# Altium PCB Ejercicio2.PcbDoc
Units mm, origin at the board's own origin, x right, y up, seen from the top; angles counter-clockwise.
Board outline 77.6 x 53.4 mm, 4 copper layers (Component Side, Ground Plane, Power Plane, Solder Side), stack 0.844 mm thick; 52 components, 26 nets, 282 pads, 96 vias.
Unrouted connection lines stored in the file: 7.
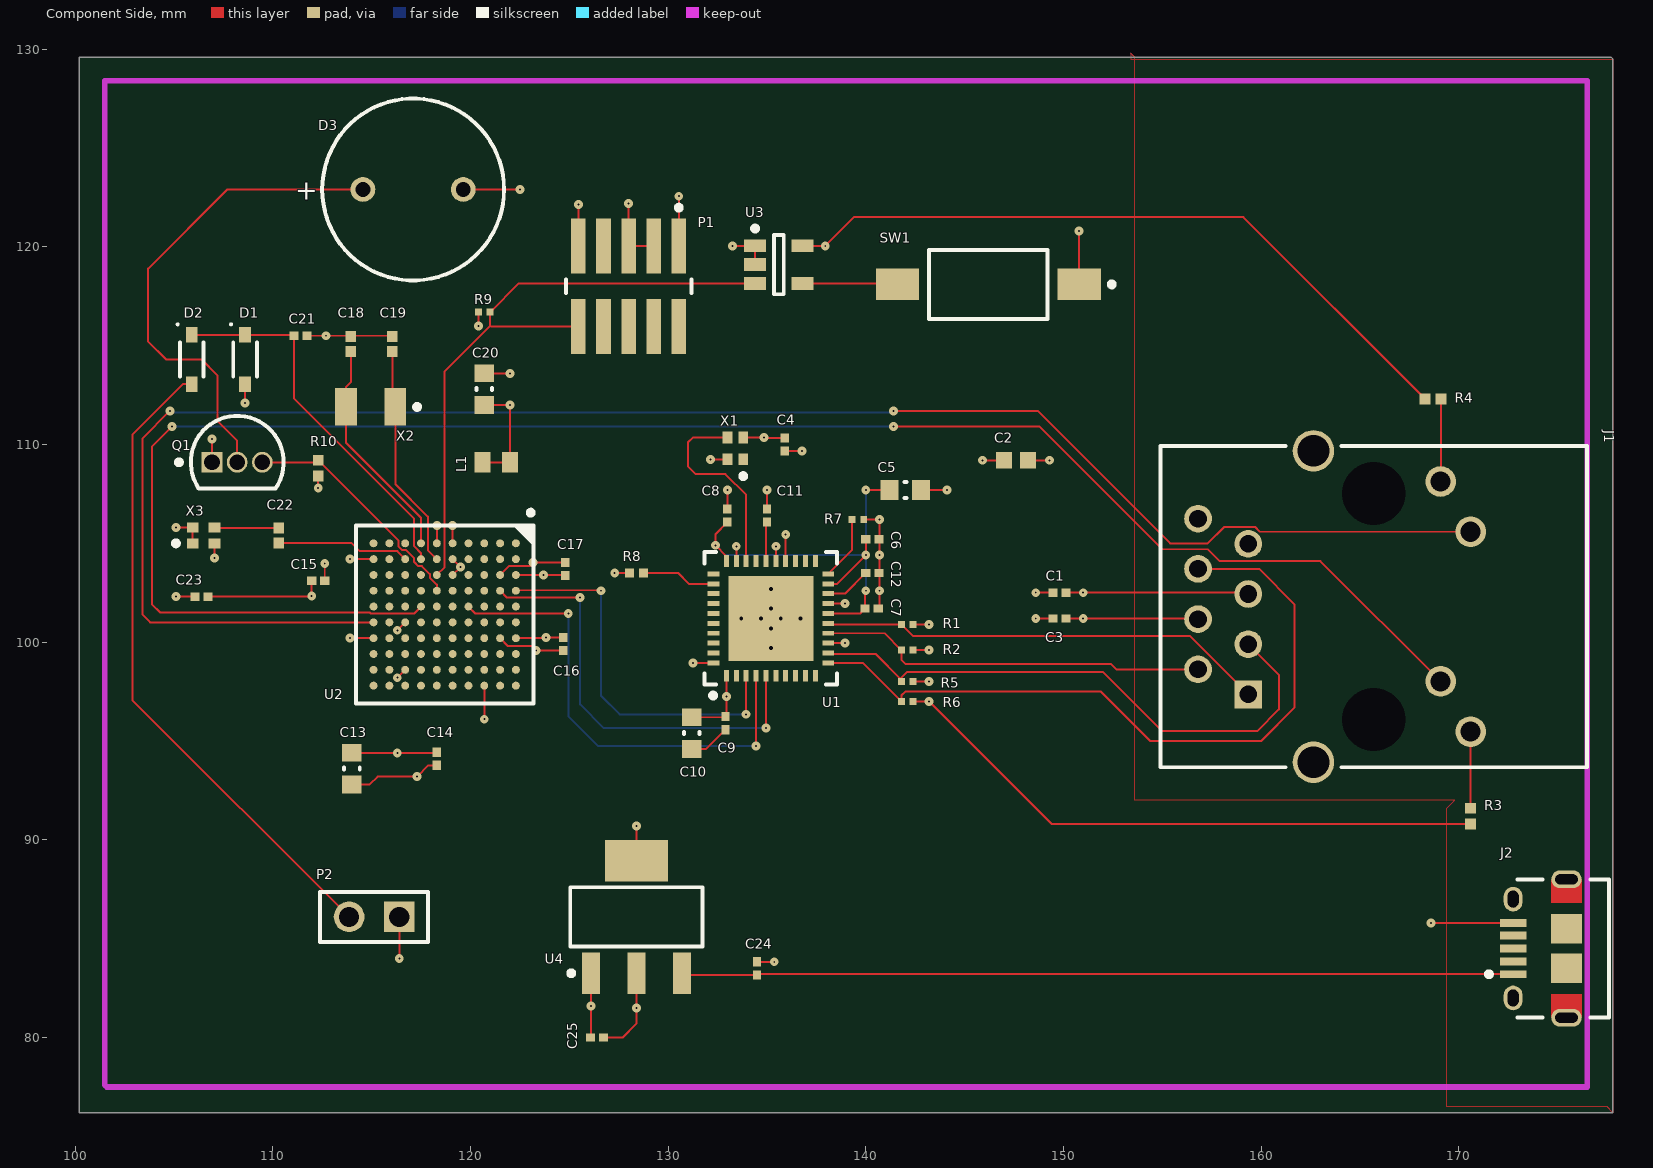
[diagram p0: Component Side view]
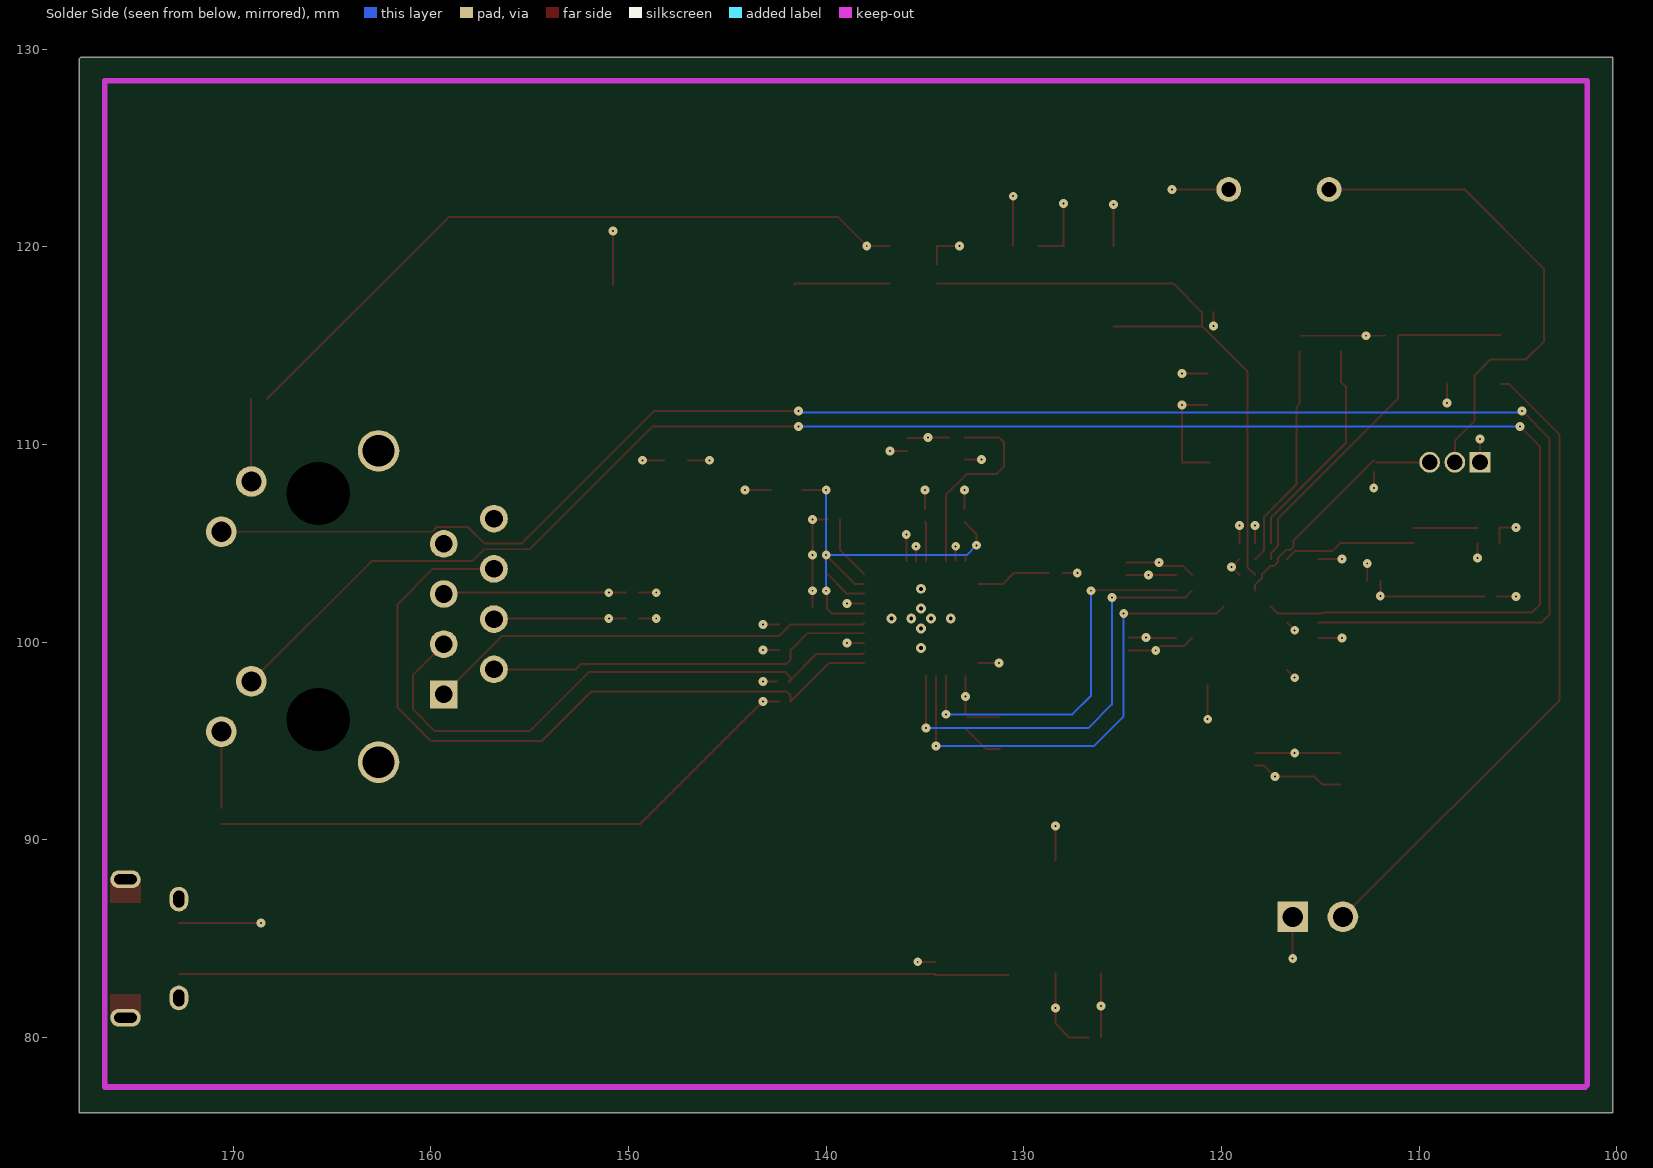
[diagram p1: Solder Side view, seen from below]
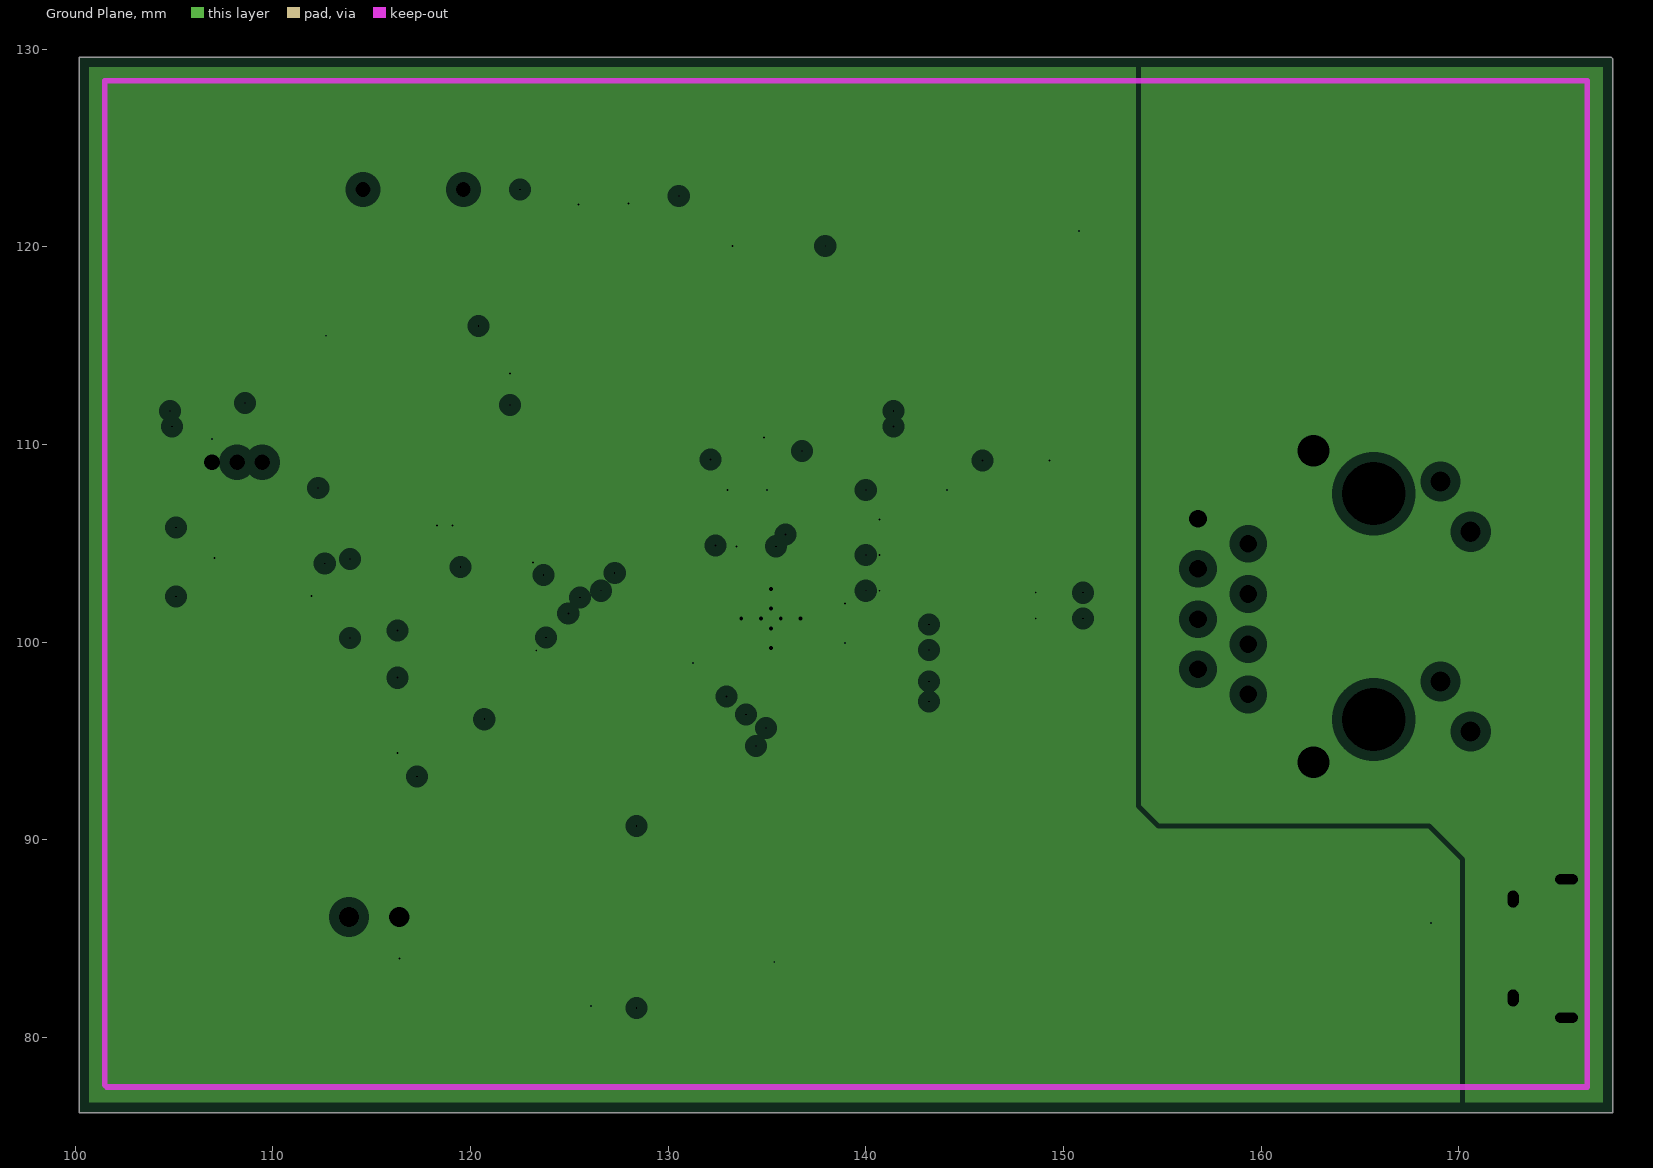
[diagram p2: Ground Plane, clearances drawn from the general rule]
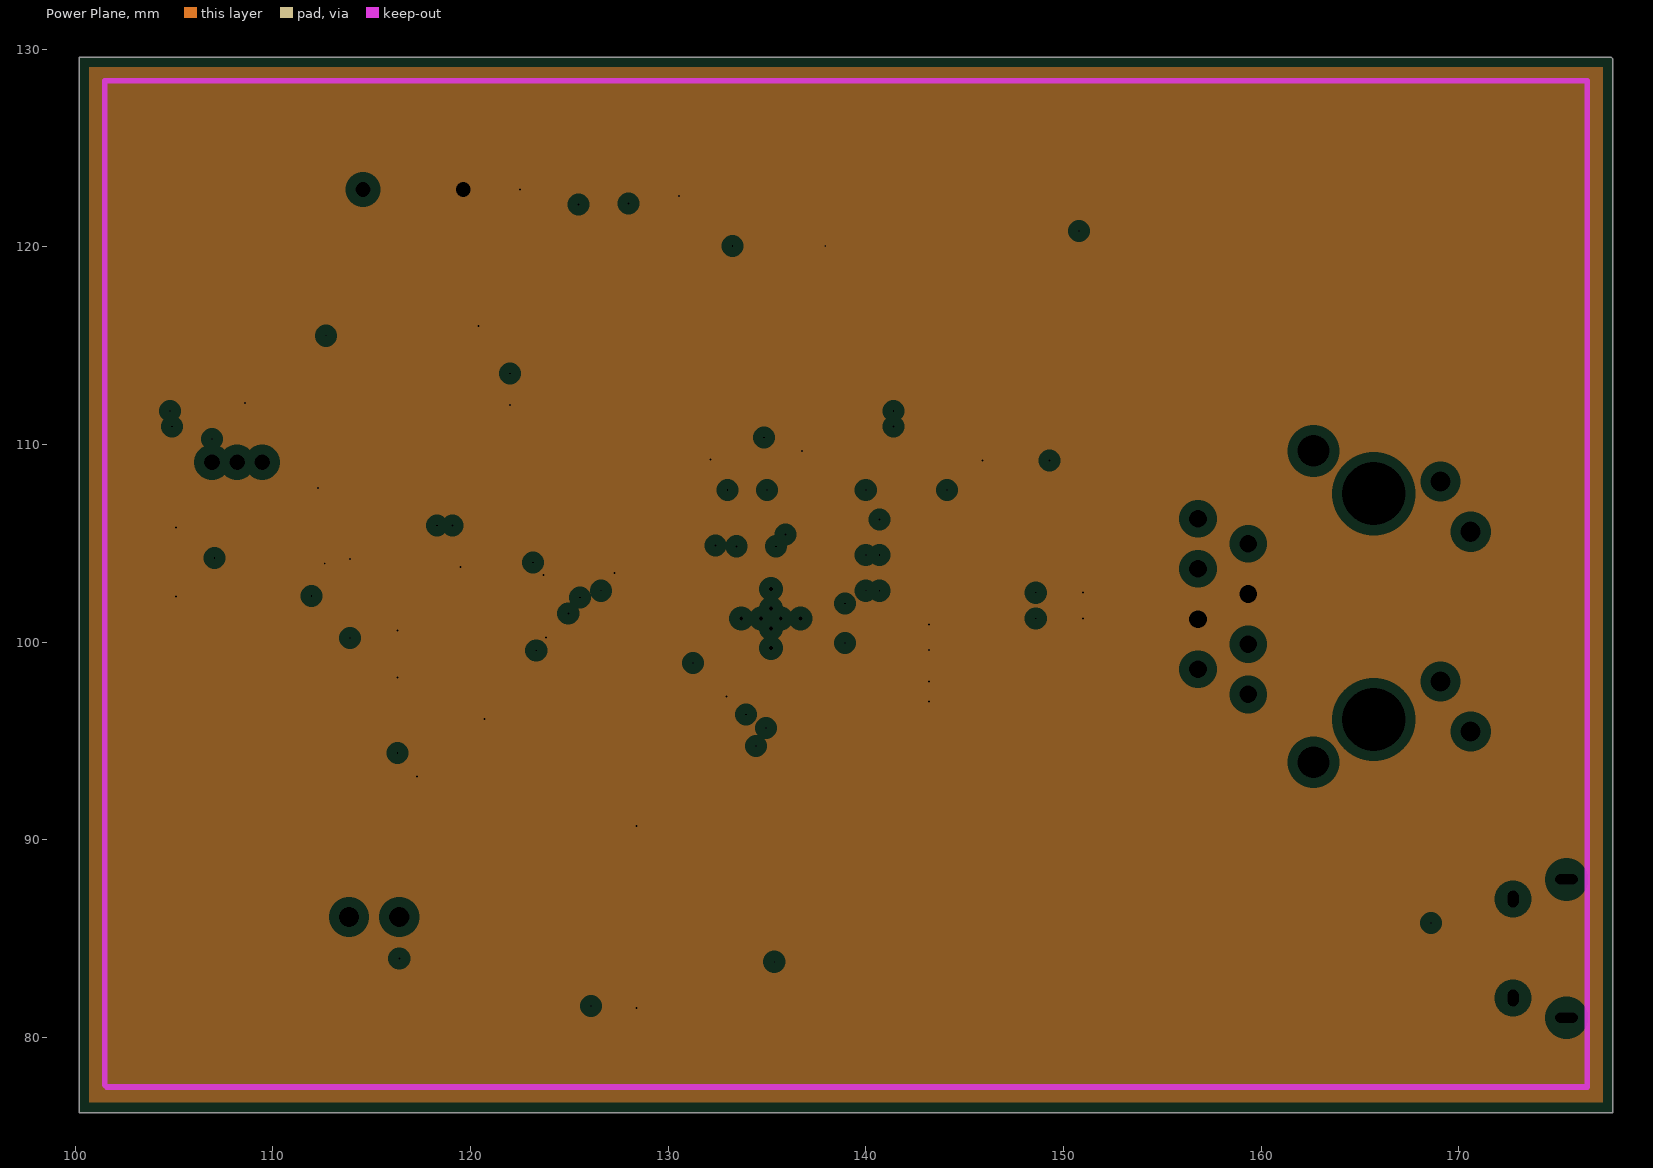
[diagram p3: Power Plane, clearances drawn from the general rule]

## Layer stack, top to bottom
Top Solder: solder mask 0.0102, Solder Resist, Dk 3.5
Component Side: signal copper 0.0356
Dielectric 1: core 0.32, FR-4, Dk 4.8
Ground Plane: plane copper 0.036, net (Multiple Nets)
Dielectric 3: prepreg 0.127, Dk 4.2
Power Plane: plane copper 0.036, net VCC3
Dielectric 4: core 0.254, Dk 4.2
Solder Side: signal copper 0.0356
Bottom Solder: solder mask 0.0102, Solder Resist, Dk 3.5

## Board outline
100.2,76.2 100.2,129.6 177.7,129.6 177.8,129.5 177.8,76.2

## Design rules (kind name [scope] priority, off if disabled: settings)
Clearance [All] p1: gap=0.1
PlaneClearance [All] p1: clearance=0.508
PlaneConnect [All] p1: planeconnectstyle=Relief reliefexpansion=0.508 reliefentries=4 reliefconductorwidth=0.254 reliefairgap=0.254
PolygonConnect [All] p1: connectstyle=Relief reliefconductorwidth=0.254 reliefentries=4 polygonreliefangle="90 Angle" airgapwidth=0.254
RoutingVias [All] p1: holewidth=0.1 width=0.45 viastyle="Through Hole" minholewidth=0.1 minwidth=0.45 maxholewidth=0.1 maxwidth=0.45
SolderMaskExpansion [All] p1: expansion=0.102
UnpouredPolygon [All] p1: allowunpoured=FALSE
Width [All] p1: maxlimit=0.2 minlimit=0.1 preferedwidth=0.1 minimp=50.000000 maximp=50.000000 favimp=50.000000
27 further rules are at their usual default settings.

## Classes and differential pairs
component class Proyecto: R10
component class Ejercicio3: D3

## Components (designator, comment, footprint, x,y, rotation, side; value= is the part's Value field where it differs from the comment)
C1 "CAP 100nF 16V 0201(0603)" CAPC0201(0603)33_N 149.8,102.5 r180 top
C2 "GRM188R71C104KA01D" MURA-0603_H_0.9_L 147.6,109.2 r180 top
C3 "CAP 100nF 16V 0201(0603)" CAPC0201(0603)33_N 149.8,101.2 r0 top
C4 "CAP 100nF 16V 0201(0603)" CAPC0201(0603)33_N 135.9,110 r90 top
C5 "CAP 10uF 10V 0603(1608)" CAPC0603(1608)100_N 142,107.7 r0 top
C6 "CAP 100nF 16V 0201(0603)" CAPC0201(0603)33_N 140.33,105.2 r0 top
C7 "CAP 100nF 16V 0201(0603)" CAPC0201(0603)33_N 140.3,101.7 r0 top
C8 "CAP 100nF 16V 0201(0603)" CAPC0201(0603)33_N 133,106.4 r90 top
C9 "CAP 100nF 16V 0201(0603)" CAPC0201(0603)33_N 132.9,95.9 r90 top
C10 "CAP 10uF 10V 0603(1608)" CAPC0603(1608)100_N 131.2,95.4 r90 top
C11 "CAP 100nF 16V 0201(0603)" CAPC0201(0603)33_N 135,106.4 r90 top
C12 "CAP 100nF 16V 0201(0603)" CAPC0201(0603)33_N 140.33,103.5 r0 top
C13 "CAP 10uF 10V 0603(1608)" CAPC0603(1608)100_N 114,93.6 r270 top
C14 "CAP 100nF 16V 0201(0603)" CAPC0201(0603)33_N 118.3,94.1 r270 top
C15 "CAP 100nF 16V 0201(0603)" CAPC0201(0603)33_N 112.3,103.1 r0 top
C16 "CAP 100nF 16V 0201(0603)" CAPC0201(0603)33_N 124.7,99.9 r90 top
C17 "CAP 100nF 16V 0201(0603)" CAPC0201(0603)33_N 124.8,103.7 r270 top
C18 "CAP 18pF 50V 0201(0603)" CAPC0201(0603)33_M 113.95,115.08 r270 top
C19 "CAP 18pF 50V 0201(0603)" CAPC0201(0603)33_M 116.05,115.08 r270 top
C20 "CAP 1uF 50V 0603(1608)" CAPC0603(1608)100_N 120.7,112.8 r270 top
C21 "CAP 100nF 16V 0201(0603)" CAPC0201(0603)33_N 111.4,115.5 r0 top
C22 "CAP 100pF 50V 0201(0603)" CAPC0201(0603)33_M 110.3,105.4 r270 top
C23 "CAP 100nF 16V 0201(0603)" CAPC0201(0603)33_N 106.4,102.3 r0 top
C24 "CAP 100nF 16V 0201(0603)" CAPC0201(0603)33_N 134.5,83.5 r90 top
C25 "CAP 100nF 16V 0201(0603)" CAPC0201(0603)33_N 126.4,80 r180 top
D1 "BAT60A" INF-SOD323_V 108.6,114.3 r0 top
D2 "BAT60A" INF-SOD323_V 105.9,114.3 r0 top
D3 "BPW21R" VISH-BPW21R-2 117.1,122.9 r0 top
J1 "J0011D21BNL" PULS-J00XXD21XNL-B-12 165.7,101.8 r270 top
J2 "10118194-0001LF" FCI-10118194-0001LF-5_V 174.1,84.5 r90 top
L1 "GLFR1608T4R7M-LR" INDC1608X100X35NL20T15 121.3,109.1 r180 top
P1 "FTSH-105-01-L-DV" SMTC-FTSH-105-01-L-DV_V 128,118 r180 top
P2 "TSW-102-26-G-S" SMTC-TSW-102-26-XX-S 116.4,86.1 r180 top
Q1 "2N3904" ONSC-TO-92-3-29-11 108.2,109.1 r0 top
R1 "49R9 1% 0201(0603)" RESC0201(0603)_L 142.1,100.9 r180 top
R2 "49R9 1% 0201(0603)" RESC0201(0603)_L 142.1,99.6 r0 top
R3 "200R 1% 0201" RESC0201(0603)_M 170.6,91.2 r270 top
R4 "200R 1% 0201" RESC0201(0603)_M 168.7,112.3 r180 top
R5 "49R9 1% 0201(0603)" RESC0201(0603)_L 142.1,98 r180 top
R6 "49R9 1% 0201(0603)" RESC0201(0603)_L 142.1,97 r0 top
R7 "4K87 1% 0201" RESC0201(0603)_L 139.6,106.2 r0 top
R8 "2K2 1% 0201" RESC0201(0603)_N 128.4,103.5 r180 top
R9 "100K 1% 0201(0603)" RESC0201(0603)_L 120.7,116.7 r0 top
R10 "2k7R 1% 0201" RESC0201(0603)_M 112.3,108.8 r270 top
SW1 "FSMSM" TECO-FSMSM-2_V 146.2,118.1 r180 top
U1 "DP83848JSQ" SQA40B 135.2,101.2 r90 top
U2 "LPC1768FET100" SOT926-1 118.7,101.4 r270 top
U3 "LM3724IM5-3.08" MF05A_N 135.6,119.1 r0 top
U4 "LD1117S33TR" SOT-223_L 128.4,86.1 r90 top
X1 "ASCO-50.000MHZ-EK-T3" ABRA-ASCO-50.000MHZ-EK-T3-4_V 133.4,109.8 r90 top
X2 "ABS07-32.768KHz-T" ABRA-ABS07-2_V 114.95,111.9 r180 top
X3 "ASCO-12.000MHZ-EK-T3" ABRA-ASCO-50.000MHZ-EK-T3-4_V 106.5,105.4 r0 top

## Footprints (in the part's own frame and the unit in brackets; to place one, negate y for a bottom-side part, rotate by r counter-clockwise, add the part's x,y. Pads: shape width x height; smd on the part's side, far side on the other; paste and mask are expansions set on the pad)
ABRA-ABS07-2_V [mm] "Hand Drawn, 2-Leads, Body 3.2x1.5mm, Pitch 2.5mm"
  rect 1.1x1.9 smd: 1(-1.25,0) 2(1.25,0)
  silkscreen extent -2.48,-0.12 -2.23,0.12, body extent -1.6,-0.75 1.6,0.75, height 0.9
ABRA-ASCO-50.000MHZ-EK-T3-4_V [mm] "Hand Drawn, 4-Leads, Body 1.6x1.2mm"
  rect 0.6x0.5 smd: 1(-0.55,-0.4) 2(0.55,-0.4) 3(0.55,0.4) 4(-0.55,0.4)
  silkscreen extent -1.52,-0.53 -1.28,-0.28, body extent -0.8,-0.6 0.8,0.6, height 0.7
CAPC0201(0603)33_M [mm] "Chip Capacitor, Body 0.6x0.3mm, Height 0.33mm, IPC Low Density"
  rect 0.56x0.52 smd: 1(-0.38,0) 2(0.38,0)
  body extent -0.31,-0.17 0.32,0.16, height 0.33
CAPC0201(0603)33_N [mm] "Chip Capacitor, Body 0.6x0.3mm, Height 0.33mm, IPC Medium Density"
  rect 0.46x0.42 smd: 1(-0.33,0) 2(0.33,0)
  body extent -0.31,-0.16 0.32,0.17, height 0.33
CAPC0603(1608)100_N [mm] "Chip Capacitor, Body 1.6x0.8mm, Height 1.0mm, IPC Medium Density"
  rect 0.9x1 smd: 1(-0.8,0) 2(0.8,0)
  silkscreen extent -0.05,-0.4 0.05,0.4, body extent -0.87,-0.48 0.88,0.47, height 1
FCI-10118194-0001LF-5_V [mm] "SMD, 5-Leads, Body 7x5mm, Pitch 0.65 mm"
  rect 0.4x1.35 smd: 1(-1.3,1.35) 2(-0.65,1.35) 3(0,1.35) 4(0.65,1.35) 5(1.3,1.35)
  oval 1.25x0.95 hole 0.55 slot 0.85 at 0 deg: 6(-2.5,1.35) 7(2.5,1.35)
  oval 0.9x1.55 hole 0.5 slot 1.15 at 90 deg: 8(-3.5,-1.35) 9(3.5,-1.35)
  rect 1.5x1.55 smd: 10(-1,-1.35) 11(1,-1.35)
  Component Side region: 3.5,-2.125 3.5,-0.575 2.3,-0.575 2.3,-2.125
  Component Side region: -2.3,-2.125 -2.3,-0.575 -3.5,-0.575 -3.5,-2.125
  silkscreen extent -3.5,-3.5 3.5,2.7, body extent -4.02,-4.03 4.02,1.55, height 2.72
INDC1608X100X35NL20T15 [mm] "Chip Inductor, 2-Leads, Body 1.8x1mm, IPC Medium Density"
  rect 0.81x1.02 smd: 1(-0.7,0) 2(0.7,0)
  body extent -0.9,-0.5 0.9,0.5, height 1
INF-SOD323_V [mm] "SOD, 2-Leads, Body 1.7x1.25 mm"
  rect 0.6x0.8 smd: 1(0,1.25) 2(0,-1.25)
  silkscreen extent -0.76,-0.85 0.6,1.83, body extent -0.63,-0.85 0.63,0.85, height 1.1
MF05A_N [mm] "SOT23, 5-Leads, Body 2.9x1.6mm, Pitch 0.95mm, Lead Span 2.8mm, IPC Medium Density"
  rect 1.1x0.65 smd: 1(-1.2,0.95) 2(-1.2,0) 3(-1.2,-0.95) 4(1.2,-0.95) 5(1.2,0.95)
  silkscreen extent -1.32,-1.5 0.25,1.95, body extent -0.83,-1.49 0.83,1.5, height 1.19
MURA-0603_H_0.9_L [mm] "SMD, 2-Leads, Body 1.7x0.9mm, IPC High Density"
  rect 0.8x0.85 smd: 1(-0.6,0) 2(0.6,0)
  body extent -0.85,-0.45 0.85,0.45, height 0.9
ONSC-TO-92-3-29-11 [mm] "TO, 3-Leads, Body Dia 4.7mm, Pitch 1.27mm"
  rect 1.05x1.05 hole 0.8: 1(-1.27,0)
  round 1.05 hole 0.8: 2(0,0) 3(1.27,0)
  silkscreen extent -3.07,-1.34 2.35,2.35, body extent -2.36,-1.34 2.36,2.36, height 7.87
PULS-J00XXD21XNL-B-12 [mm] "RJ45, 12-Leads, Body 16.26x21.59mm, Pitch 1.27mm"
  rect 1.4x1.4 hole 0.89: 1(4.445,-6.35)
  round 1.4 hole 0.89: 2(3.175,-8.89) 3(1.905,-6.35) 4(0.635,-8.89) 5(-0.635,-6.35) 6(-1.905,-8.89) 7(-3.175,-6.35) 8(-4.445,-8.89)
  round 1.55 hole 1.02: 9(6.325,4.9) 10(3.785,3.38) 11(-3.785,4.9) 12(-6.325,3.38)
  round 0 hole 3.2 unplated: MH1(5.715,0) MH2(-5.715,0)
  round 2.1 hole 1.6: S1(7.875,-3.05) S2(-7.875,-3.05)
  silkscreen extent -8.13,-10.8 8.13,10.79, body extent -8.13,-10.79 8.13,10.8, height 17.13
RESC0201(0603)_L [mm] "Chip Resistor, Body 0.6x0.3mm, IPC High Density"
  rect 0.35x0.35 smd: 1(-0.3,0) 2(0.3,0)
  body extent -0.31,-0.16 0.31,0.16, height 0.3
RESC0201(0603)_M [mm] "Chip Resistor, Body 0.6x0.3mm, IPC Low Density"
  rect 0.55x0.55 smd: 1(-0.4,0) 2(0.4,0)
  body extent -0.31,-0.16 0.31,0.16, height 0.3
RESC0201(0603)_N [mm] "Chip Resistor, Body 0.6x0.3mm, IPC Medium Density"
  rect 0.45x0.45 smd: 1(-0.35,0) 2(0.35,0)
  body extent -0.31,-0.16 0.31,0.16, height 0.3
SMTC-FTSH-105-01-L-DV_V [mm] "CONN, 10-Leads, Body 6.35x3.43mm, Pitch 1.27mm"
  rect 0.74x2.79 smd: 1(-2.54,-2.035) 2(-2.54,2.035) 3(-1.27,-2.035) 4(-1.27,2.035) 5(0,-2.035) 6(0,2.035) 7(1.27,-2.035) 8(1.27,2.035) 9(2.54,-2.035) 10(2.54,2.035)
  silkscreen extent -3.17,-4.1 3.18,0.34, body extent -3.17,-2.92 3.18,2.92, height 5.96
SMTC-TSW-102-26-XX-S [mm] ".025 SQ Post Terminal Strip Assembly, 1x2 Pins, Vertical, 2.54mm Pitch, Male"
  rect 1.55x1.55 hole 1.02: 1(0,0)
  round 1.55 hole 1.02: 2(2.54,0)
  silkscreen extent -1.46,-1.27 4,1.27, body extent -1.4,-1.27 3.81,1.27, height 8.38
SOT926-1 [mm] "BGA, 100-Leads, Body 9x9mm, Pitch 0.8mm"
  round 0.4 smd: A1(-3.6,3.6) A2(-2.8,3.6) A3(-2,3.6) A4(-1.2,3.6) A5(-0.4,3.6) A6(0.4,3.6) A7(1.2,3.6) A8(2,3.6) A9(2.8,3.6) A10(3.6,3.6) B1(-3.6,2.8) B2(-2.8,2.8) B3(-2,2.8) B4(-1.2,2.8) B5(-0.4,2.8) B6(0.4,2.8) B7(1.2,2.8) B8(2,2.8) B9(2.8,2.8) B10(3.6,2.8) C1(-3.6,2) C2(-2.8,2) C3(-2,2) C4(-1.2,2) C5(-0.4,2) C6(0.4,2) C7(1.2,2) C8(2,2) C9(2.8,2) C10(3.6,2) D1(-3.6,1.2) D2(-2.8,1.2) D3(-2,1.2) D4(-1.2,1.2) D5(-0.4,1.2) D6(0.4,1.2) D7(1.2,1.2) D8(2,1.2) D9(2.8,1.2) D10(3.6,1.2) E1(-3.6,0.4) E2(-2.8,0.4) E3(-2,0.4) E4(-1.2,0.4) E5(-0.4,0.4) E6(0.4,0.4) E7(1.2,0.4) E8(2,0.4) E9(2.8,0.4) E10(3.6,0.4) F1(-3.6,-0.4) F2(-2.8,-0.4) F3(-2,-0.4) F4(-1.2,-0.4) F5(-0.4,-0.4) F6(0.4,-0.4) F7(1.2,-0.4) F8(2,-0.4) F9(2.8,-0.4) F10(3.6,-0.4) G1(-3.6,-1.2) G2(-2.8,-1.2) G3(-2,-1.2) G4(-1.2,-1.2) G5(-0.4,-1.2) G6(0.4,-1.2) G7(1.2,-1.2) G8(2,-1.2) G9(2.8,-1.2) G10(3.6,-1.2) H1(-3.6,-2) H2(-2.8,-2) H3(-2,-2) H4(-1.2,-2) H5(-0.4,-2) H6(0.4,-2) H7(1.2,-2) H8(2,-2) H9(2.8,-2) H10(3.6,-2) J1(-3.6,-2.8) J2(-2.8,-2.8) J3(-2,-2.8) J4(-1.2,-2.8) J5(-0.4,-2.8) J6(0.4,-2.8) J7(1.2,-2.8) J8(2,-2.8) J9(2.8,-2.8) J10(3.6,-2.8) K1(-3.6,-3.6) K2(-2.8,-3.6) K3(-2,-3.6) K4(-1.2,-3.6) K5(-0.4,-3.6) K6(0.4,-3.6) K7(1.2,-3.6) K8(2,-3.6) K9(2.8,-3.6) K10(3.6,-3.6)
  silkscreen extent -5.27,-4.5 4.5,4.5, body extent -4.5,-4.5 4.5,4.5, height 1.4
SOT-223_L [mm] "SOT223, 4-Leads, Body 6.5x3.5mm, Pitch 2.3mm, Lead Span 7mm, IPC High Density"
  rect 2.1x0.9 smd: 1(-2.85,2.3) 2(-2.85,0) 3(-2.85,-2.3)
  rect 2.1x3.2 smd: 4(2.85,0)
  silkscreen extent -2.97,-3.35 1.5,3.42, body extent -1.85,-3.35 1.85,3.35, height 1.8
SQA40B [mm] "QFN, 40-Leads, Body 6x6mm, Pitch 0.5mm, NSC Recommended"
  rect 0.6x0.25 smd paste-0.125 mask+0.051: 1(-2.9,2.25) 2(-2.9,1.75) 3(-2.9,1.25) 4(-2.9,0.75) 5(-2.9,0.25) 6(-2.9,-0.25) 7(-2.9,-0.75) 8(-2.9,-1.25) 9(-2.9,-1.75) 10(-2.9,-2.25) 21(2.9,-2.25) 22(2.9,-1.75) 23(2.9,-1.25) 24(2.9,-0.75) 25(2.9,-0.25) 26(2.9,0.25) 27(2.9,0.75) 28(2.9,1.25) 29(2.9,1.75) 30(2.9,2.25)
  rect 0.25x0.6 smd paste-0.125 mask+0.051: 11(-2.25,-2.9) 12(-1.75,-2.9) 13(-1.25,-2.9) 14(-0.75,-2.9) 15(-0.25,-2.9) 16(0.25,-2.9) 17(0.75,-2.9) 18(1.25,-2.9) 19(1.75,-2.9) 20(2.25,-2.9) 31(2.25,2.9) 32(1.75,2.9) 33(1.25,2.9) 34(0.75,2.9) 35(0.25,2.9) 36(-0.25,2.9) 37(-0.75,2.9) 38(-1.25,2.9) 39(-1.75,2.9) 40(-2.25,2.9)
  rect 4.3x4.3 smd paste-2.15 mask+0.051: 41(0,0)
  silkscreen extent -4.02,-3.35 3.35,3.35, body extent -3.05,-3.05 3.05,3.05, height 0.8
TECO-FSMSM-2_V [mm] "SMD, 2-Leads, Body 6x3.5mm, Pitch 9.19mm"
  rect 2.2x1.6 smd: 1(-4.595,0)
  rect 2.18x1.6 smd: 2(4.595,0)
  silkscreen extent -6.37,-1.75 3,1.75, body extent -4.98,-1.75 4.98,1.75, height 4.4
VISH-BPW21R-2 [mm] "THD, 2-Leads, Dia 9.2mm, Height 3.3mm, Pin Spacing 5.08mm"
  round 1.25 hole 0.75: 1(-2.54,0) 2(2.54,0)
  silkscreen extent -4.6,-4.6 4.6,4.6, body extent -4.61,-4.61 4.61,4.61, height 3.3

## Part data
C1 C3 C4 C6 C7 C8 C9 C11 C12 C14 C15 C16 C17 C21 C23 C24 C25: library part CMP-1033-00663-1, "CAP 100nF 16V ±10% 0201 (0603 Metric) Thickness 0.33mm SMD"
C2: library part CMP-2000-05253-1, "CAP, Ceramic, 0.1 uF, 10%, 16 V, 0603, RoHS, Tape and Reel"
C5 C10 C13: library part CMP-1035-02799-1, "CAP 10uF 10V ±10% 0603 (1608 Metric) Thickness 1mm SMD"
C18 C19: library part CMP-1033-00395-1, "CAP 18pF 50V ±2% 0201 (0603 Metric) Thickness 0.33mm SMD"
C20: library part CMP-1035-02746-1, "CAP 1uF 50V ±20% 0603 (1608 Metric) Thickness 1mm SMD"
C22: library part CMP-1033-00496-1, "CAP 100pF 50V ±2% 0201 (0603 Metric) Thickness 0.33mm SMD"
D1 D2: library part CMP-1183-00008-2, "Silicon Schottky Diode, -55 to 85 degC, SOD323, Reel, Green"
D3: library part CMP-2000-05428-1, "Silicon Photodiode, 565 nm, -40 to 125 degC, 2-Pin TO-5, RoHS, Bulk"
J1: library part CMP-2000-05321-1, "10/100 Base-TX RJ45 1 x 1 Tab-Down with LEDs Integrated Magnetics Connector, 0 to 70 degC, 12-Pin THD, RoHS, Tube"
J2: library part CMP-2000-05120-1, "Micro USB B Type Receptacle, 1.8 A, -55 to 85 degC, 5-Pin SMD, RoHS, Tape and Reel"
L1: library part CMP-2000-06322-1, "Chip Inductor, 4.7 uH, +/- 20%, -40 to 105 degC, 0603 (1608 Metric), RoHS, Tape and Reel"
P1: library part CMP-2000-05354-1, "Male Header, Pitch 1.27 mm, 2 x 5 Position, Height 5.96 mm, -55 to 125 degC, RoHS, Bulk"
P2: library part CMP-1024-00327-1, "0.025\" SQ Post Header, Through-hole, Vertical, -55 to 125 degC, 2.54 mm Pitch, 2-Pin, Male, RoHS"
Q1: library part CMP-2000-05562-1, "General Purpose Transistor, NPN Silicon, 200 mA, 60 V, -55 to 150 degC, 3-Pin TO-92, RoHS, Bulk"
R1 R2 R5 R6: library part CMP-1010-00269-1, "49R9 0.05W 1% 0201 (0603 Metric)  SMD"
R3 R4 R10: library part CMP-1010-00335-1, "200R 0.05W 1% 0201 (0603 Metric)  SMD"
R7: library part CMP-1010-00494-1, "4K87 0.05W 1% 0201 (0603 Metric)  SMD"
R8: library part CMP-1010-00452-1, "2K2 0.05W 1% 0201 (0603 Metric)  SMD"
R9: library part CMP-1010-00565-1, "22K 0.05W 1% 0201 (0603 Metric)  SMD"
SW1: library part CMP-2000-07511-1, "FSMSM Push Button Switch, 50 mA, -35 to 85 degC, 2-Pin SMD, RoHS, Bulk"
U1: library part CMP-0058-00374-3, "PHYTER® Mini LS Commercial Temperature Single Port 10/100 Mb/s Ethernet Transceiver, 40-pin LLP"
U2: library part CMP-0174-00003-3, "Cortex-M3, 32-Bit ARM MCU, 512 kB flash, 64 kB SRAM, Ethernet, USB 2.0 Device/Host/OTG, 12-Bit ADC, DAC, I2S, 100-Pin TFBGA"
U3: library part CMP-0063-01084-2, "Microprocessor Reset Circuits, 5-pin SOT-23"
U4: library part CMP-0244-00310-1, "Fixed Low Drop Positive Voltage Regulator, 3.3V, 4-Pin SOT-223, Tape and Reel"
X1 X3: library part CMP-0461-00001-3, "Crystal Clock Oscillator, 50 MHz, -20 to 70 degC, 1.6 x 1.2 x 0.7 mm SMD"
X2: library part CMP-0447-00001-2, "Crystal, 32.768 kHz, 12.5 pF, -40 to 85 degC, SMD Low Profile 3.2 x 1.5 x 0.9 mm, Tape and Reel"

## Via types
v1: diameter 0.45, hole 0.1, Component Side to Solder Side, 88 vias
v2: diameter 0.5, hole 0.2, Component Side to Solder Side, 8 vias

## Nets (pads, with @x,y where several pads share a name; then routed paths per layer and width w, separated by ;. In a path a pad name is that pad's centre, name@x,y a point inside that pad or via, vN(x,y) a via of type N, cw(c..) or ccw(c..) an arc to the next point about the centre after c; other vN are vias at no path point)
ANALOGICODIGITAL: Q1.3 R10.1 U2.F4 | length 12
  Component Side w0.1: Q1.3 R10.1@112.2,109.1 ; R10.1 116.35,105.15 116.35,104.855 116.555,104.65 116.745,104.65 117.15,104.245 117.15,104.055 117.355,103.85 117.545,103.85 117.95,103.445 117.95,103.255 118.3,102.905 U2.F4
GND: C1.2 C2.1 C3.1 C4.2 C5.2 C6.2 C7.2 C8.2 C9.1 C10.1 C11.2 C12.2 C13.1 C14.1 C15.1 C16.1 C17.1 C18.1 C19.1 C20.1 C21.2 C23.2 C24.2 C25.2 J2.5 P1.3 P1.5 P1.9 P2.1 Q1.1 R7.2 SW1.1 U1.13 U1.17 U1.29 U1.40 U1.41 U2.B3 U2.B7 U2.C9 U2.E1 U2.F1 U2.G7 U2.J6 U2.K3 U3.1 U3.2 U4.1 X1.2 X3.2 | length 79.1
  Component Side w0.1: C23.2 v1@111.94,102.3 ; Q1.1 v1(106.93,110.27) ; v1(107.05,104.25) X3.2 ; C21.2 v1(112.7,115.5) ; v1(111.97,102.33) C15.1 ; C13.1 v1(116.3,94.4) C14.1@118.27,94.4 ; v1(116.4,84) P2.1 ; U2.F1 v1(118.3,105.9) ; U2.E1 v1(119.1,105.9) ; C20.1 v1(122,113.6) ; U2.B7 121.9,99.8 123.1,99.8 v1(123.33,99.57) C16.1 ; U2.B3 121.95,103.85 122.99,103.85 v1(123.17,104.03) C17.1 ; P1.9 v1(125.46,122.14) ; C25.2@126.1,80.03 v1(126.1,81.6) U4.1 ; v1(128,122.2) P1.5 P1.3 ; C10.1 131.93,94.6 C9.1 ; v1(131.25,98.95) U1.40 ; C8.2 v1(133,107.7) ; v1(133.25,120.05) U3.1 U3.2 ; U1.29 v1(133.45,104.85) ; X1.2 v1(134.85,110.35) 134.87,110.33 C4.2 ; C24.2 v1(135.37,83.83) v1@135.4,83.8 ; C11.2 v1(135,107.7) ; U1.13 v1(138.95,99.95) ; U1.17 v1(138.95,101.95) ; R7.2 v1(140.7,106.2) ; C7.2@140.7,101.77 v1(140.7,102.6) ; C5.2 v1(144.1,107.7) ; C2.1 v1(149.3,109.2) ; v1(148.6,101.2) C3.1 ; v1(148.6,102.5) C1.2 ; SW1.1 v1(150.795,120.795) ; v1(168.6,85.8) J2.5 ; v1(112.7,115.5) 116.01,115.5 v1(112.7,115.5) ; v1(112.7,115.5) 113.95,115.5 v1(112.7,115.5) ; v1(140.7,102.6) v1(140.7,104.4) ; v1(140.7,102.6) v1(140.7,104.4) ; v1(140.7,104.4) v1(140.7,106.2) ; v1(140.7,104.4) 140.7,105.2 v1(140.7,104.4) ; v1(140.7,104.4) 140.7,103.5 v1(140.7,104.4) ; v1(140.7,104.4) v1(140.7,106.2)
  other v1: 135.2,99.7 135.2,100.7 133.7,101.2 134.7,101.2 135.7,101.2 136.7,101.2 135.2,101.7 135.2,102.7
  other v2: 135.2,99.7 135.2,100.7 133.7,101.2 134.7,101.2 135.7,101.2 136.7,101.2 135.2,101.7 135.2,102.7
GND_CHASSIS: J1.8 J1.S1 J1.S2 J2.6 J2.7 J2.8 J2.9 J2.10 J2.11
NetC5_1: C5.1 C6.1 C7.1 C8.1 U1.16 U1.19 U1.30 | length 22.7
  Component Side w0.1: U1.30 132.95,104.35 v1(132.4,104.9) 132.4,105.47 C8.1 ; U1.16 139.72,101.45 C7.1 139.97,102.57 v1(140,102.6) ; U1.19 138.55,102.95 v1(140,104.4) C6.1 ; v1(140,107.7) C5.1
  Solder Side w0.1: v1(132.4,104.9) 132.9,104.4 v1(140,104.4) ; v1(140,102.6) v1(140,104.4) ; v1(140,107.7) v1(140,104.4)
NetC11_1: C11.1 U1.26 | length 2
  Component Side w0.1: U1.26 134.95,106.02 C11.1
NetC12_1: C12.1 U1.18 | length 2.3
  Component Side w0.1: U1.18 138.95,102.45 C12.1
NetC18_2: C18.2 U2.G1 X2.2 | length 11.4
  Component Side w0.1: C18.2 113.95,113.15 113.7,112.9 X2.2 113.7,110.1 117.5,106.3 U2.G1
NetC19_2: C19.2 U2.F2 X2.1 | length 11.4
  Component Side w0.1: C19.2 116.05,112.05 X2.1 116.2,108 117.85,106.35 117.85,104.65 U2.F2
NetC22_1: C22.1 X3.3 | length 3.3
  Component Side w0.1: X3.3 107.07,105.78 C22.1
NetC22_2: C22.2 U2.H2 | length 6.7
  Component Side w0.1: C22.2 113.98,105.02 114.4,104.6 116.3,104.6 U2.H2
NetC24_1: C24.1 J2.1 U4.3 | length 80.2
  Component Side w0.1: U4.3@130.78,83.17 C24.1 ; C24.1@134.5,83.2 J2.1 C24.1@134.5,83.2
NetD2_2: D2.2 P2.2 | length 33
  Component Side w0.1: D2.2 105.45,113.05 102.9,110.5 102.9,97.06 P2.2
NetD3_1: D3.1 Q1.2 | length 25.2
  Component Side w0.1: Q1.2 108.2,110.2 107.2,111.2 107.2,113.5 106.4,114.3 104.6,114.3 103.7,115.2 103.7,118.9 107.7,122.9 D3.1
NetJ1_1: J1.1 R1.2 U1.15 | length 22.7
  Component Side w0.1: U1.15 138.15,100.9 R1.2 142.4,100.3 156.405,100.3 J1.1
NetJ1_2: J1.2 R2.1 U1.14 | length 19.8
  Component Side w0.1: U1.14 140.95,100.45 R2.1 141.8,99.1 142,98.9 152.4,98.9 152.675,98.625 J1.2
NetJ1_3: J1.3 R5.2 U1.12 | length 30.2
  Component Side w0.1: U1.12 138.15,99.4 140.5,99.4 R5.2@141.8,98.1 ; R5.2 R5.2@141.8,98.1 ; J1.3 160.9,98.345 160.9,96.6 159.8,95.5 155,95.5 152,98.5 142.1,98.5 141.8,98.2 R5.2@141.8,98.1 ; R5.2@141.8,98.1 R5.2@141.85,98.05 ; R5.2@141.8,98.1 R5.2@141.85,98.05 ; R5.2@141.8,98.1 R5.2@141.85,98.05 ; R5.2@141.8,98.1 R5.2@141.85,98.05 ; R5.2@141.8,98.1 R5.2@141.85,98.05 ; R5.2@141.8,98.1 R5.2@141.85,98.05 ; R5.2@141.8,98.1 R5.2@141.85,98.05 ; R5.2@141.8,98.1 R5.2@141.85,98.05 ; R5.2@141.85,98.05 R5.2@141.9,98 ; R5.2@141.85,98.05 R5.2@141.9,98 ; R5.2@141.85,98.05 R5.2@141.9,98 ; R5.2@141.85,98.05 R5.2@141.9,98
NetJ1_6: J1.6 R6.1 U1.11 | length 37.4
  Component Side w0.1: U1.11 139.75,98.95 139.85,98.95 R6.1 141.8,97.3 142,97.5 151.9,97.5 154.4,95 160,95 161.7,96.7 161.7,101.9 159.895,103.705 J1.6
NetJ1_9: J1.9 R3.1 | length 3.9
  Component Side w0.1: R3.1 J1.9
NetJ1_12: J1.12 R4.1 | length 4.2
  Component Side w0.1: J1.12 169.1,108.145 R4.1
NetR7_1: R7.1 U1.20 | length 3.2
  Component Side w0.1: U1.20 139.3,104.65 R7.1
NetR8_1: R8.1 U1.32 | length 3.8
  Component Side w0.1: R8.1 130.5,103.5 131.05,102.95 U1.32
NetSW1_2: SW1.2 U3.4 | length 4.8
  Component Side w0.1: U3.4 141.555,118.15 SW1.2
NetU1_28: U1.28 X1.3 | length 10.2
  Component Side w0.1: X1.3 131.25,110.35 131,110.1 131,108.9 131.4,108.5 132.9,108.5 133.95,107.45 U1.28
NRESET: P1.10 R9.2 U2.F3 U3.3 | length 32.8
  Component Side w0.1: U2.F3 118.7,103.8 118.7,113.7 121,116 R9.2 122.45,118.15 U3.3 ; 121.035,115.965 P1.10
VBATTERY: C21.1 D1.1 D2.1 U2.G2 | length 19.2
  Component Side w0.1: D2.1 D1.1 111.02,115.55 C21.1 111.07,112.33 117.15,106.25 117.15,104.855 117.5,104.505 U2.G2
VCC3: C1.1 C2.2 C3.2 C4.1 C9.2 C10.2 C13.2 C14.2 C15.2 C16.2 C17.2 C20.2 C23.1 C25.1 D1.2 D3.2 J1.4 J1.5 L1.1 L1.2 P1.1 R1.1 R2.2 R3.2 R4.2 R5.1 R6.2 R8.2 R9.1 R10.2 U1.1 U2.A3 U2.A7 U2.C10 U2.E2 U2.E3 U2.H6 U2.H9 U2.K2 U3.5 U4.2 U4.4 X1.4 X3.1 X3.4 | length 131.2
  Component Side w0.1: v1(105.1,102.3) C23.1 ; v1(105.1,105.8) X3.4 X3.1 ; v1(108.6,112.1) D1.2 ; v1(112.3,107.8) R10.2 R10.2@112.3,108.6 ; v1@112.6,104 v1(112.63,103.97) C15.2 ; v1(113.9,104.2) U2.K2 ; C13.2 114.9,92.8 115.3,93.2 v1(117.3,93.2) 117.87,93.77 C14.2 ; v1(116.3,98.2) U2.H9 ; v1(116.3,100.6) U2.H6 ; U2.E3 v1(119.5,103.8) U2.E2 ; D3.2 v1(122.5,122.9) ; v1(120.4,116) R9.1 ; L1.2 L1.1 v1(122,112) C20.2 ; v1(120.7,96.1) U2.C10 ; U2.A7 123.8,100.2 v1(123.83,100.23) C16.2 ; U2.A3 v1(123.7,103.4) ; C25.1 127.7,80 128.4,80.7 v1(128.4,81.5) U4.2 ; v1(127.3,103.5) R8.2 ; U4.4 v1(128.4,90.7) ; v1@130.5,122.6 v1(130.54,122.56) P1.1 ; C10.2 C9.2@132.87,96.2 ; v1@132.1,109.3 v1(132.15,109.25) X1.4 ; C9.2@132.95,96.38 v1(132.95,97.25) U1.1 ; C4.1 v1(136.77,109.67) ; U3.5 v1(137.95,120.05) 139.4,121.5 159.1,121.5 R4.2 ; R6.2 v1(143.2,97) 149.4,90.8 R3.2 ; R2.2 v1(143.2,99.6) ; R1.1 v1(143.2,100.9) ; R5.1@142.5,98 v1(143.2,98) ; v1(145.9,109.2) C2.2 ; C3.2 v1(151,101.2) J1.4@156.775,101.2 ; C1.1 v1(151,102.5) J1.5@159.285,102.5 ; v1(123.7,103.4) 124.8,103.4 v1(123.7,103.4)
pads on no net: J1.7 J1.10 J1.11 J1.MH1 J1.MH2 J2.2 J2.3 J2.4 P1.2 P1.4 P1.6 P1.7 P1.8 U1.2 U1.3 U1.4 U1.5 U1.6 U1.7 U1.8 U1.9 U1.10 U1.21 U1.22 U1.23 U1.24 U1.25 U1.27 U1.31 U1.33 U1.34 U1.35 U1.36 U1.37 U1.38 U1.39 U2.A1 U2.A2 U2.A4 U2.A5 U2.A6 U2.A8 U2.A9 U2.A10 U2.B1 U2.B2 U2.B4 U2.B5 U2.B6 U2.B8 U2.B9 U2.B10 U2.C1 U2.C2 U2.C3 U2.C4 U2.C5 U2.C6 U2.C7 U2.C8 U2.D1 U2.D2 U2.D3 U2.D4 U2.D5 U2.D6 U2.D7 U2.D8 U2.D9 U2.D10 U2.E4 U2.E5 U2.E6 U2.E7 U2.E8 U2.E9 U2.E10 U2.F5 U2.F6 U2.F7 U2.F8 U2.F9 U2.F10 U2.G3 U2.G4 U2.G5 U2.G6 U2.G8 U2.G9 U2.G10 U2.H1 U2.H3 U2.H4 U2.H5 U2.H7 U2.H8 U2.H10 U2.J1 U2.J2 U2.J3 U2.J4 U2.J5 U2.J7 U2.J8 U2.J9 U2.J10 U2.K1 U2.K4 U2.K5 U2.K6 U2.K7 U2.K8 U2.K9 U2.K10 X1.1
copper on no net: | length 274.9
  Component Side w0.1: v1(104.8,111.7) 103.4,110.3 103.4,101.4 103.8,101 115.1,101 ; v1(104.9,110.9) 103.9,109.9 103.9,101.9 104.3,101.5 114.905,101.5 114.955,101.45 117.15,101.45 117.5,101.8 ; v1(113.9,100.2) 115.1,100.2 ; 119.9,101.8 120.25,101.45 v1(124.95,101.45) ; 121.5,102.6 121.85,102.25 v1(125.55,102.25) ; 122.3,102.6 122.3,102.625 ; v1(126.6,102.6) v1@126.575,102.625 ; v1(133.95,96.35) 133.95,98.3 ; v1(134.45,94.75) 134.45,98.3 ; v1(134.95,95.65) 134.95,98.3 ; 135.45,104.1 v1(135.45,104.85) ; 135.95,104.1 v1(135.95,105.45) ; v1(141.4,110.9) 148.8,110.9 155,104.7 157.3,104.7 157.9,104.1 162.995,104.1 169.08,98.015 ; v1(141.4,111.7) 148.7,111.7 155.4,105 157.3,105 158.125,105.825 159.702,105.825 159.942,105.585 170.6,105.585 ; 122.3,102.625 v1@126.575,102.625 ; 122.3,102.625 v1@126.575,102.625 ; 122.3,102.625 v1@126.575,102.625 ; 122.3,102.625 v1@126.575,102.625 ; 122.3,102.625 v1@126.575,102.625 ; 122.3,102.625 v1@126.575,102.625
  Solder Side w0.1: v1(104.8,111.7) 104.875,111.625 141.325,111.625 v1(141.4,111.7) ; v1(104.9,110.9) v1(141.4,110.9) ; v1(124.95,101.45) 124.95,96.25 126.45,94.75 v1(134.45,94.75) ; v1(125.55,102.25) 125.55,96.85 126.75,95.65 v1(134.95,95.65) ; v1(126.6,102.6) 126.6,97.3 127.55,96.35 v1(133.95,96.35)

## Polygon pours and split planes (outlines as drawn)
GND_CHASSIS on Component Side "GND" (solid, shelved, pour order 5): 153.4,129.5 177.8,129.5 177.8,76.2 177.5,76.5 169.4,76.5 169.4,91.6 169.8,92 153.6,92 153.6,129.6 153.4,129.8
VCC3 on Power Plane (split plane): 177.29,76.71 100.71,76.71 100.71,129.09 177.29,129.09
GND_CHASSIS on Ground Plane (split plane): 177.29,76.71 170.33,76.71 170.33,89 170.32,89.05 170.292,89.092 168.592,90.792 168.566,90.808 168.55,90.82 168.5,90.829 154.854,90.829 153.929,91.754 153.929,129.09 177.29,129.09
GND on Ground Plane (split plane): 153.671,91.7 153.68,91.65 153.708,91.608 154.708,90.608 154.75,90.58 154.8,90.571 168.446,90.571 170.071,88.946 170.071,76.71 100.71,76.71 100.71,129.09 153.671,129.09

## Keep-outs
Keep-Out Layer:
  lines w0.3: 101.5,77.6 101.5,128.4 176.5,128.4 176.5,77.5 101.6,77.5

## Other copper
Ground Plane (plane layer: these items are gaps in the copper):
  lines w0.254: 153.8,129.6 153.8,91.7 154.8,90.7 168.5,90.7 170.2,89 170.2,76.2

## Silkscreen, mask and mechanical layers (free items; w line width, h text height)
Drill Drawing:
  text ".LEGEND" at 101.5,132.1 h0.5
  text "Drill Drawing." at 100.9,129.9 h0.5

## Text inside footprints (layer, text, board x,y; h text height)
D3: Top Overlay "+" at 111.131,122.392 h1
J2: Mechanical 6 "PCB EDGE" at 177.4,89.3 h0.5 r90